# Altium PCB 1604020125郝林峰.PcbDoc
Units mil, origin at the board's own origin, x right, y up, seen from the top; angles counter-clockwise.
Board outline 6000 x 4000 mil, 2 copper layers (Top Layer, Bottom Layer); 13 components, 17 nets, 56 pads, 0 vias.
Unrouted connection lines stored in the file: 9.
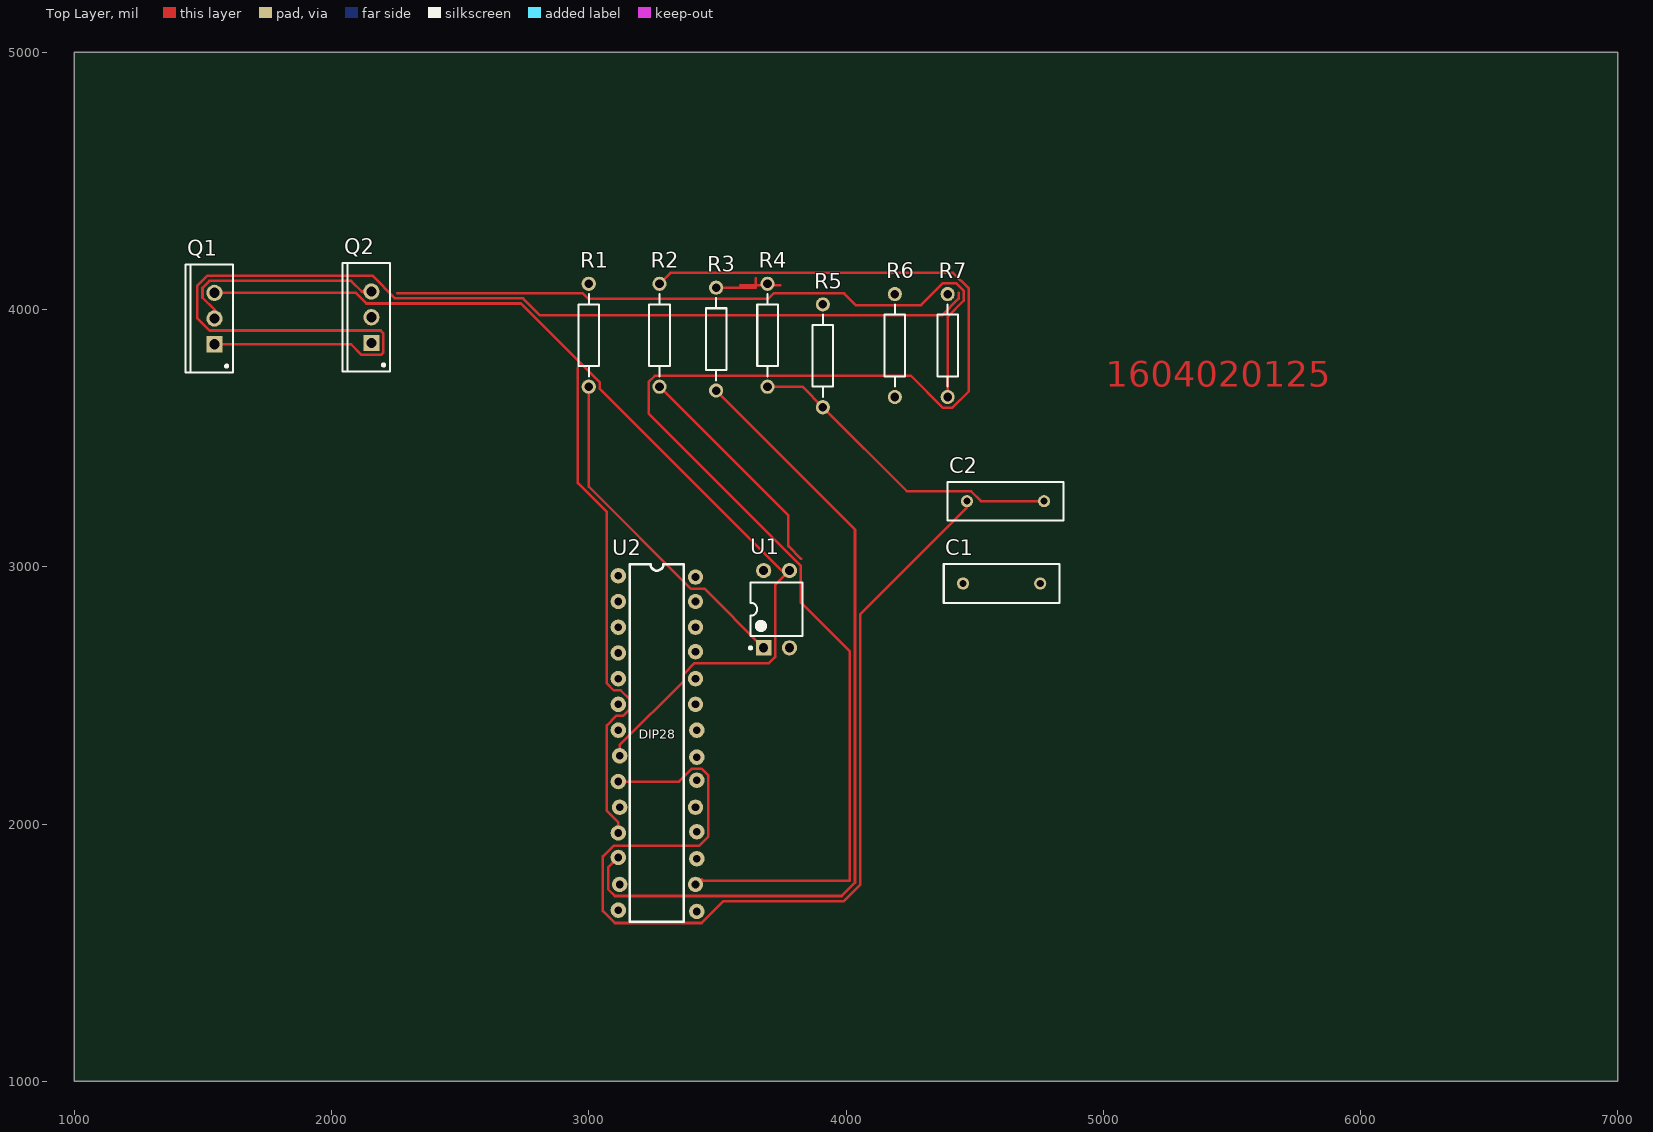
[diagram p0: Top Layer view]
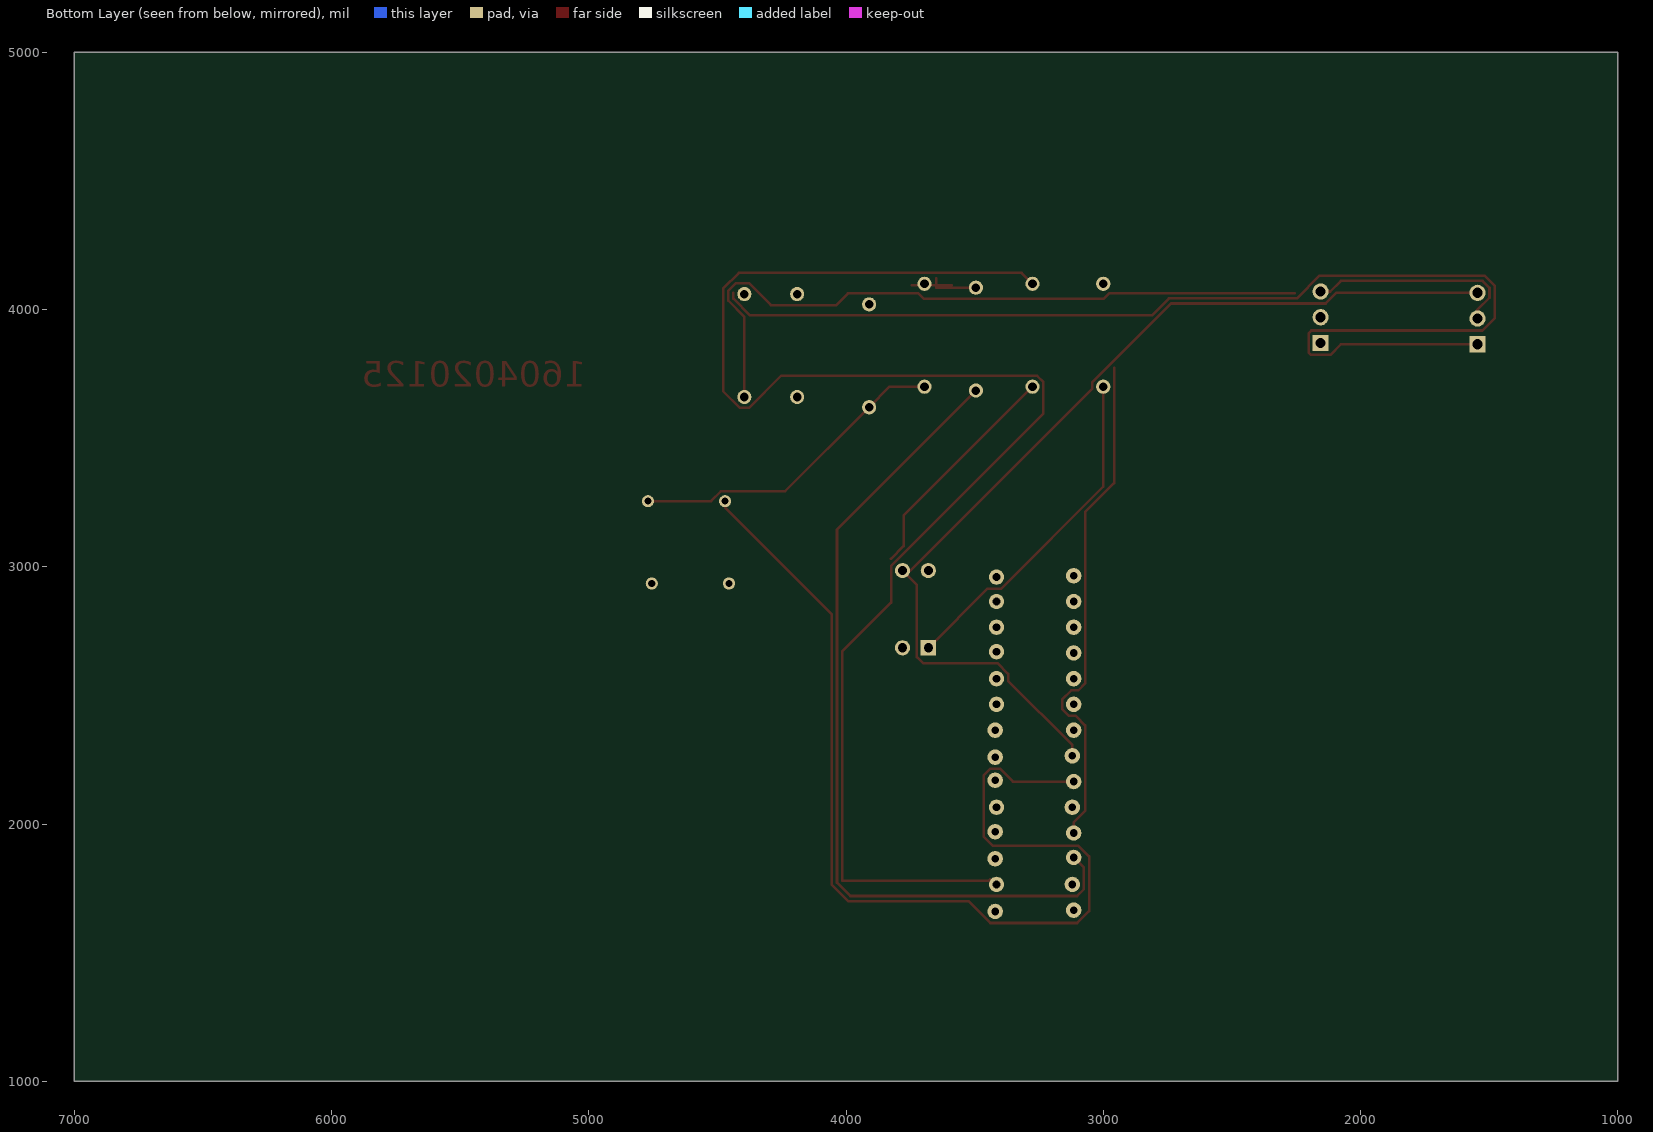
[diagram p1: Bottom Layer view, seen from below]

## Layer stack, top to bottom
Top Layer: signal copper 1.4
Dielectric: dielectric 12.6, FR-4, Dk 4.8
Bottom Layer: signal copper 1.4

## Board outline
1000,1000 7000,1000 7000,5000 1000,5000

## Design rules (kind name [scope] priority, off if disabled: settings)
Clearance [All] p1: gap=10
PolygonConnect [All] p1: connectstyle=Relief reliefconductorwidth=10 reliefentries=4 polygonreliefangle="90 Angle"
RoutingVias [All] p1: holewidth=28 width=50 viastyle="Through Hole" minholewidth=28 minwidth=50 maxholewidth=28 maxwidth=50
SilkscreenOverComponentPads [All] p1: minsilkscreentomaskgap=10
SolderMaskExpansion [All] p1: expansion=4
Width [All] p1: maxlimit=10 minlimit=10 preferedwidth=10
27 further rules are at their usual default settings.

## Components (designator, comment, footprint, x,y, rotation, side; value= is the part's Value field where it differs from the comment)
C1 "Cap" RAD-0.3 4605,2935 r180 top
C2 "Cap" RAD-0.3 4620,3255 r180 top
Q1 "IRF540S" TO-220AB 1545,3965 r90 top
Q2 "IRF540S" TO-220AB 2155,3970 r90 top
R1 "Res2" AXIAL-0.4 3000,3900 r90 top
R2 "Res2" AXIAL-0.4 3275,3900 r90 top
R3 "Res2" AXIAL-0.4 3495,3885 r90 top
R4 "Res2" AXIAL-0.4 3695,3900 r90 top
R5 "Res2" AXIAL-0.4 3910,3820 r90 top
R6 "Res2" AXIAL-0.4 4190,3860 r90 top
R7 "Res2" AXIAL-0.4 4395,3860 r90 top
U1 "Optoisolator1" DIP-4 3730,2835 r90 top
U2 "CD4060BCM" PCBComponent_1 -5385,-8235 r0 top

## Footprints (in the part's own frame and the unit in brackets; to place one, negate y for a bottom-side part, rotate by r counter-clockwise, add the part's x,y. Pads: shape width x height; smd on the part's side, far side on the other; paste and mask are expansions set on the pad)
AXIAL-0.4 [mm] "Axial Device, Thru-Hole; 2 Leads; 0.4 in Pin S"
  round 1.4 hole 0.85: 1(-5.08,0) 2(5.08,0)
  silkscreen extent -4.06,-1.02 4.06,1.02
DIP-4 [mm] "DIP; 4 Leads; Row Spacing 7.62 mm; Pitch"
  rect 1.5x1.5 hole 0.9: 1(-3.81,1.27)
  round 1.5 hole 0.9: 2(-3.81,-1.27) 3(3.81,-1.27) 4(3.81,1.27)
  silkscreen extent -3.93,-2.55 2.65,2.69, body extent -3.15,-2.5 3.15,2.5, height 5.6
PCBComponent_1 [mil]
  round 60 hole 30: 1(8500,11200) 2(8500,11100) 3(8500,11000) 4(8500,10900) 5(8500,10800) 6(8500,10700) 7(8500,10600) 8(8505,10500) 9(8500,10400) 10(8505,10300) 11(8500,10200) 12(8500,10105) 13(8505,10000) 14(8500,9900) 15(8805,9895) 16(8800,10000) 17(8805,10100) 18(8805,10205) 19(8800,10300) 20(8805,10405) 21(8805,10495) 22(8805,10600) 23(8800,10700) 24(8800,10800) 25(8800,10905) 26(8800,11000) 27(8800,11100) 28(8800,11195)
  silkscreen extent 8545,9855 8755,11245
RAD-0.3 [mm] "Radial Cap, Thru-Hole; 2 Leads; 0.3 in Pin S"
  round 1.2 hole 0.7: 1(-3.81,0) 2(3.81,0)
  silkscreen extent -5.71,-1.91 5.71,1.91
TO-220AB [mm] "TO, Thru-Hole, Vertical, Heatsink Mounted; 3 In-Line Leads; Pitch"
  rect 1.6x1.6 hole 1: 1(-2.54,0)
  round 1.6 hole 1: 2(0,0) 3(2.54,0)
  silkscreen extent -5.35,-1.85 5.35,2.85, body extent -5.4,-1.9 5.4,2.9, height 19.3

## Part data
C1 C2: "Capacitor"
Q1 Q2: library part NMOS-2, "N-Channel Power MOSFET"
R1 R2 R3 R4 R5 R6 R7: "Resistor"
U1: "4-Pin Phototransistor Optocoupler"
U2: library part Compo

## Nets (pads, with @x,y where several pads share a name; then routed paths per layer and width w, separated by ;. In a path a pad name is that pad's centre, name@x,y a point inside that pad or via, vN(x,y) a via of type N, cw(c..) or ccw(c..) an arc to the next point about the centre after c; other vN are vias at no path point)
5V: R2.2 U2.16 | length 5817.7
  Top Layer w10: R2.2 3317.56,4142.56 4416.57,4142.56 4477.56,4081.57 4477.56,3682.37 4412.63,3617.44 4377.37,3617.44 4252.25,3742.56 3257.37,3742.56 3232.44,3717.63 3232.44,3595.53 3824.53,3003.44 3824.53,2860.47 4015,2670 4015,1780 3445,1780 3440,1785
12V: Q2.1 R7.1 | length 2761.8
  Top Layer w10: Q2.1 Q2.1@2181.5,3843.5 ; 2255.54,4063.5 2976.31,4063.5 2997.37,4042.44 3698.57,4042.44 3718.69,4062.56 3992.44,4062.56 4037.56,4017.44 4292.25,4017.44 4377.37,4102.56 4428.28,4102.56 4457.56,4073.28 4457.56,4034.09 4395,3971.53 R7.1
GND: Q1.3 U1.3 U2.8 | length 3859.7
  Top Layer w10: Q1.3 2094.24,4065 2135.74,4023.5 2736.68,4023.5 3042.56,3717.63 3042.56,3692.44 3750,2985 U1.3 3724.53,2929.53 3724.53,2649.26 3700.27,2625 3411.36,2625 3370,2583.64 3370,2556.36 3120,2306.36 U2.8
NetC1_1: C1.1 R2.1 U1.4 | length 897.4
  Top Layer w10: R2.1 3775.63,3199.37 3775.63,3080.63 3825.63,3030.63
NetC1_2: C1.2 R3.2 | length 192.2
  Top Layer w10: R3.2 3649.81,4085 3649.81,4122.37
NetC2_1: C2.1 R4.1 R5.1 | length 1259.3
  Top Layer w10: R4.1 3830,3700 R5.1 4236.38,3293.62 4486,3293.62 4524.62,3255 C2.1
NetC2_2: C2.2 U2.9 | length 3992.5
  Top Layer w10: U2.9 3351.36,2165 3401.36,2215 3438.64,2215 3465,2188.64 3465,1951.36 3428.64,1915 3096.36,1915 3055,1873.64 3055,1661.36 3101.36,1615 3438.64,1615 3523.64,1700 3991.57,1700 4055,1763.43 4055,2815 4470,3230
NetQ1_1: Q1.1 R6.2 | length 4715.1
  Top Layer w10: Q1.1 2075.79,3865 2117.29,3823.5 2192.71,3823.5 2201.5,3832.29 2201.5,3907.71 2190.7,3918.5 1525.74,3918.5 1478.5,3965.74 1478.5,4092.54 1517.46,4131.5 2159.26,4131.5 2247.25,4043.5 2744.97,4043.5 2811.03,3977.44 4372.63,3977.44 4437.56,4042.37 4437.56,4065
NetQ1_2: Q1.2 Q2.3 R7.2 | length 844.7
  Top Layer w10: Q1.2 1545,3999.24 1498.5,4045.74 1498.5,4084.26 1525.74,4111.5 2076.03,4111.5 2117.53,4070 Q2.3 Q2.3@2140,4085
NetR1_1: R1.1 U1.1 | length 1328.1
  Top Layer w10: R1.1 3000,3311.36 3396.36,2915 3450,2915 U1.1
NetR3_1: R3.1 U2.12 | length 3269.5
  Top Layer w10: U2.12 3075,1830 3075,1746.36 3101.36,1720 3983.28,1720 4035,1771.72 4035,3145 R3.1
NetR4_2: R4.2 U2.11 | length 1981.2
  Top Layer w10: 2957.44,3774.46 2957.44,3325.64 3070,3213.08 3070,2546.36 3096.36,2520 3123.64,2520 3160,2483.64 3160,2446.36 3133.64,2420 3106.36,2420 3070,2383.64 3070,2051.36 3115,2006.36 U2.11
NetR5_2: R5.2 U2.10
NetR6_1: R6.1 U2.3
NetU1_2: U1.2
VCC: R1.2
VOUT: Q2.2
pads on no net: U2.1 U2.2 U2.4 U2.5 U2.6 U2.7 U2.13 U2.14 U2.15 U2.17 U2.18 U2.19 U2.20 U2.21 U2.22 U2.23 U2.24 U2.25 U2.26 U2.27 U2.28
copper on no net: | length 155
  Top Layer w10: 3590,4095 3745,4095

## Other copper
Top Layer:
  text "1604020125" at 5010,3700 h100

## Text inside footprints (layer, text, board x,y; h text height)
U2: Top Overlay "DIP28" at 3195,2320 h60